# Altium PCB PCB1.PcbDoc
Units mil, origin at the board's own origin, x right, y up, seen from the top; angles counter-clockwise.
Board outline 1625 x 1985 mil, 2 copper layers (Top Layer, Bottom Layer); 28 components, 17 nets, 88 pads, 25 vias.
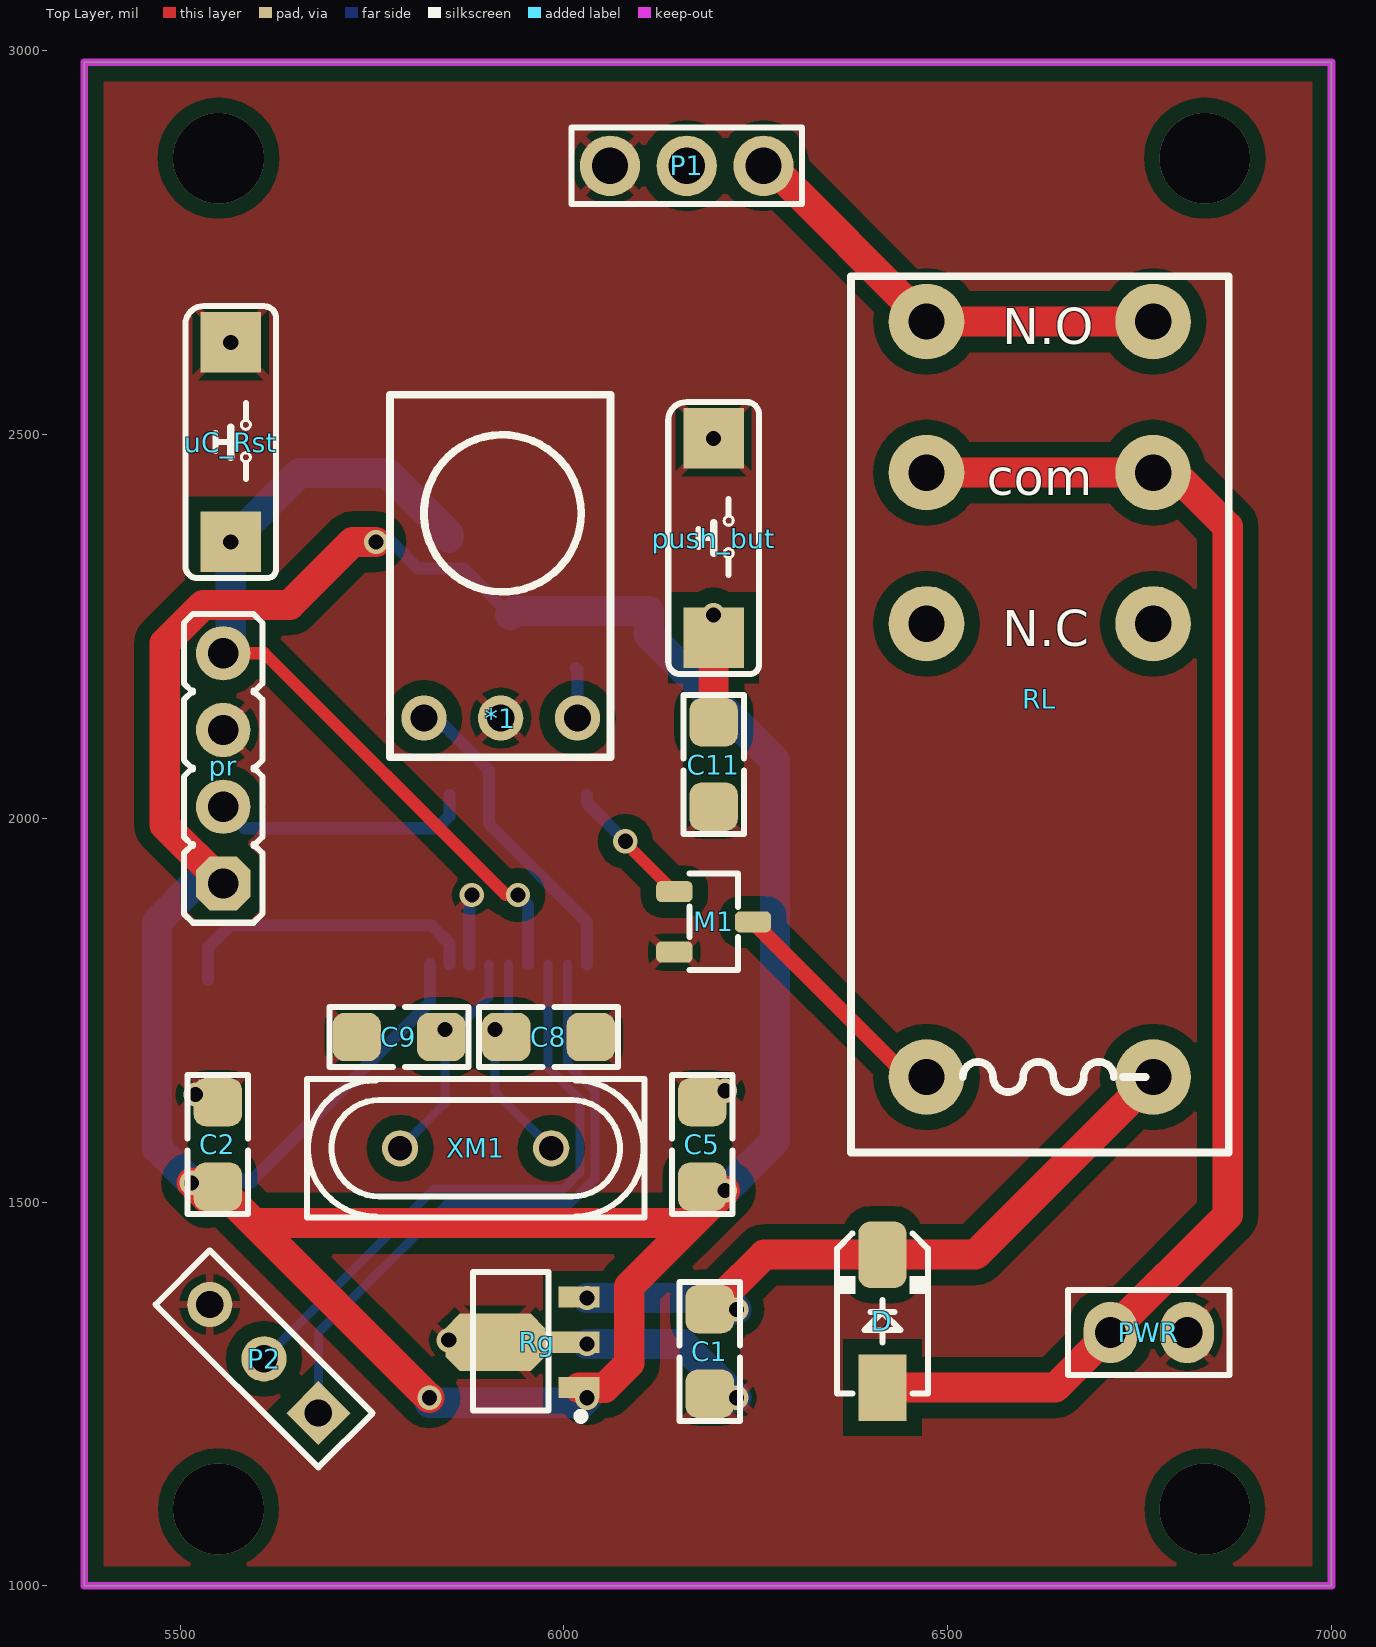
[diagram p0: Top Layer view]
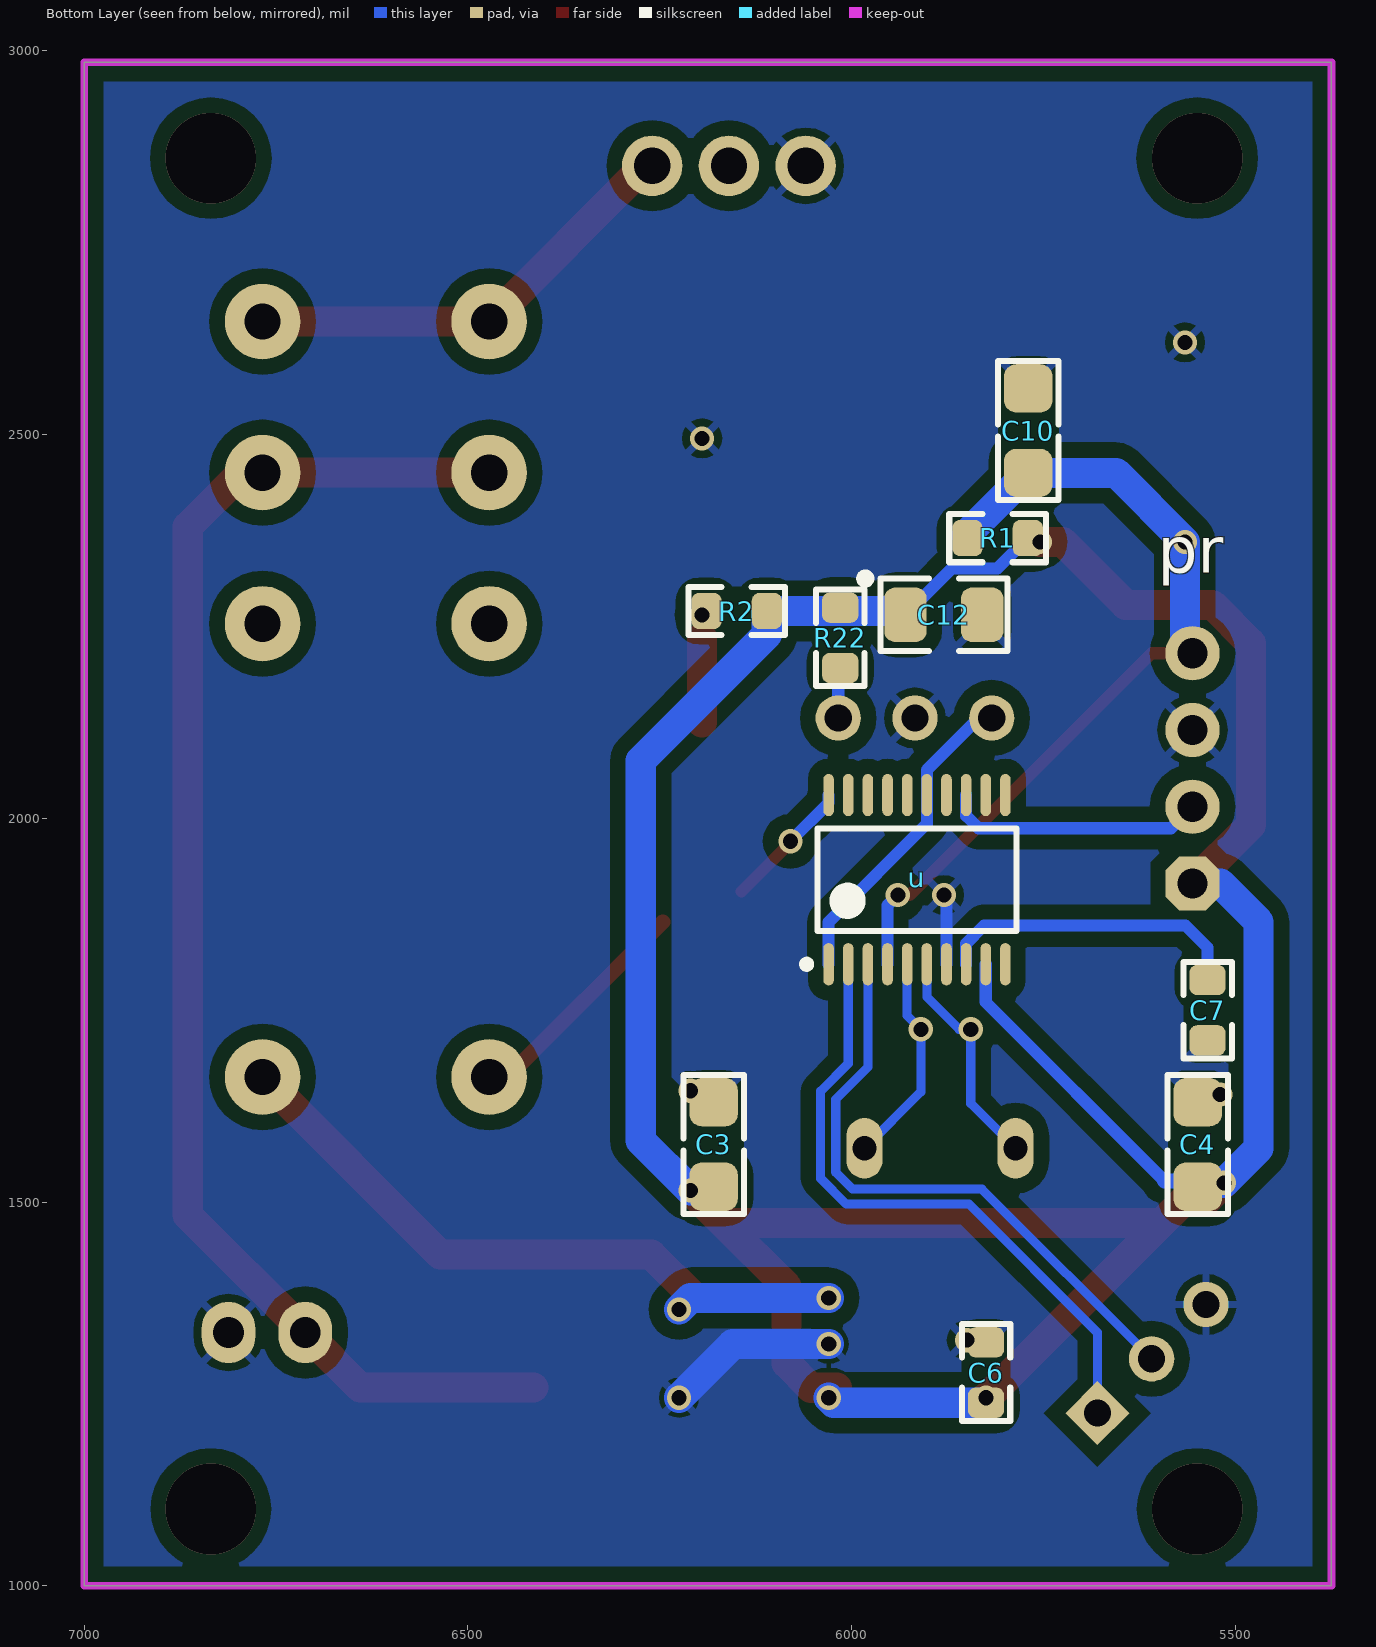
[diagram p1: Bottom Layer view, seen from below]
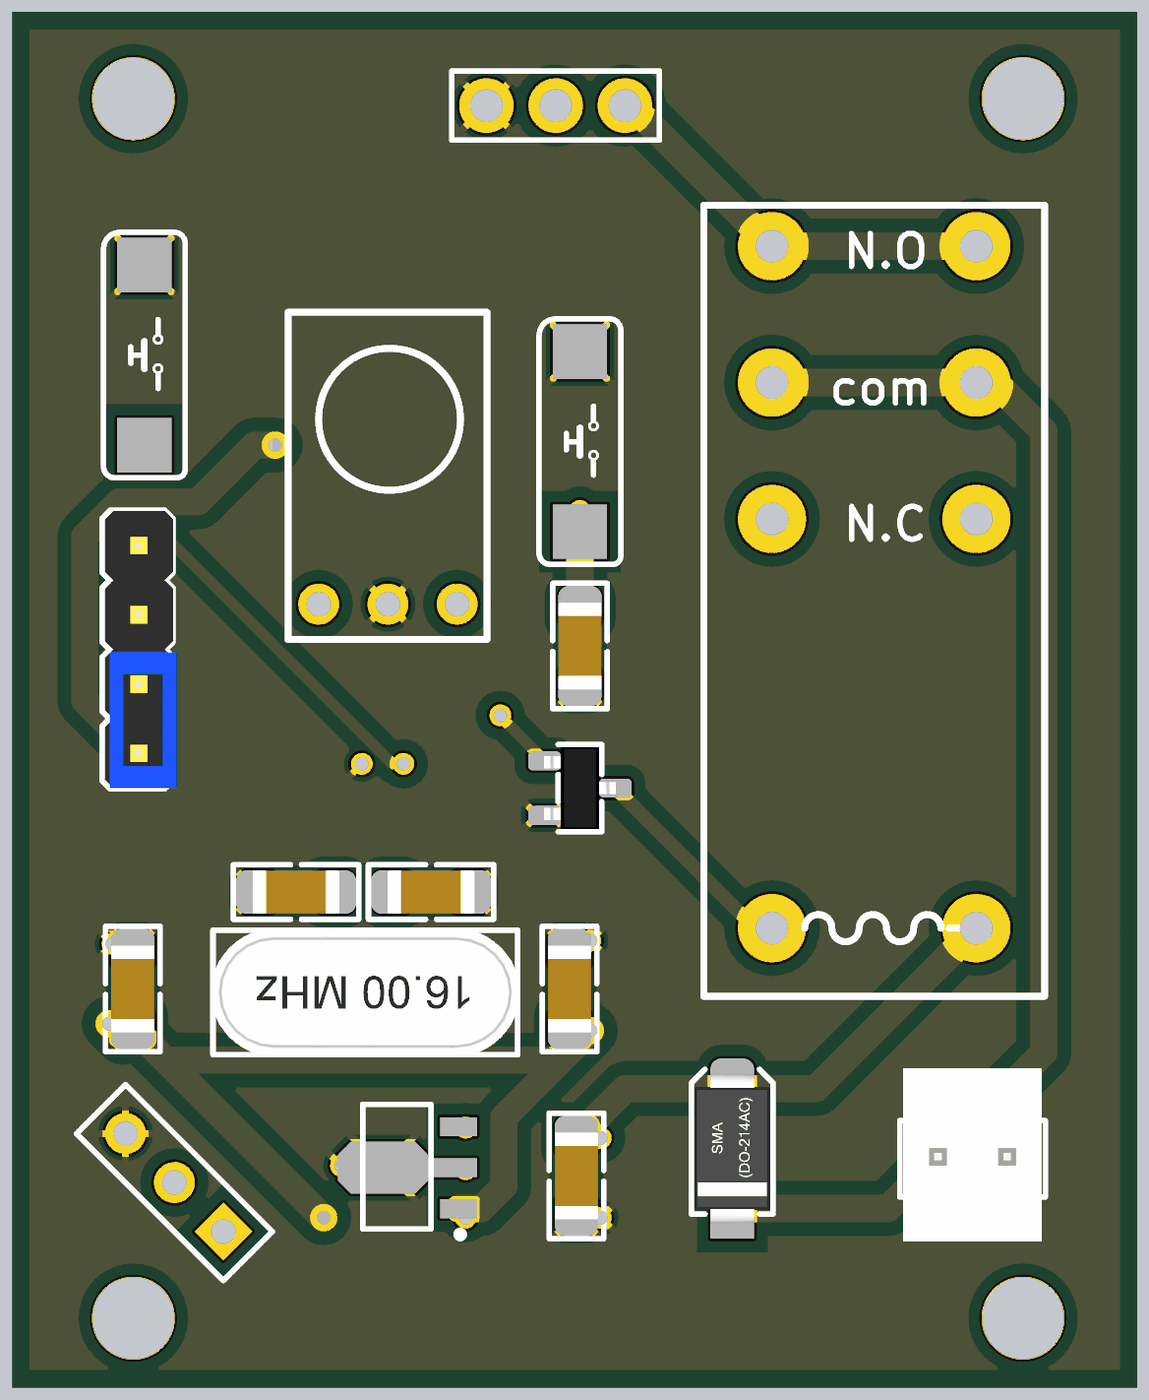
[diagram p2: 3D render of the assembled board from above, using the file's embedded part models]
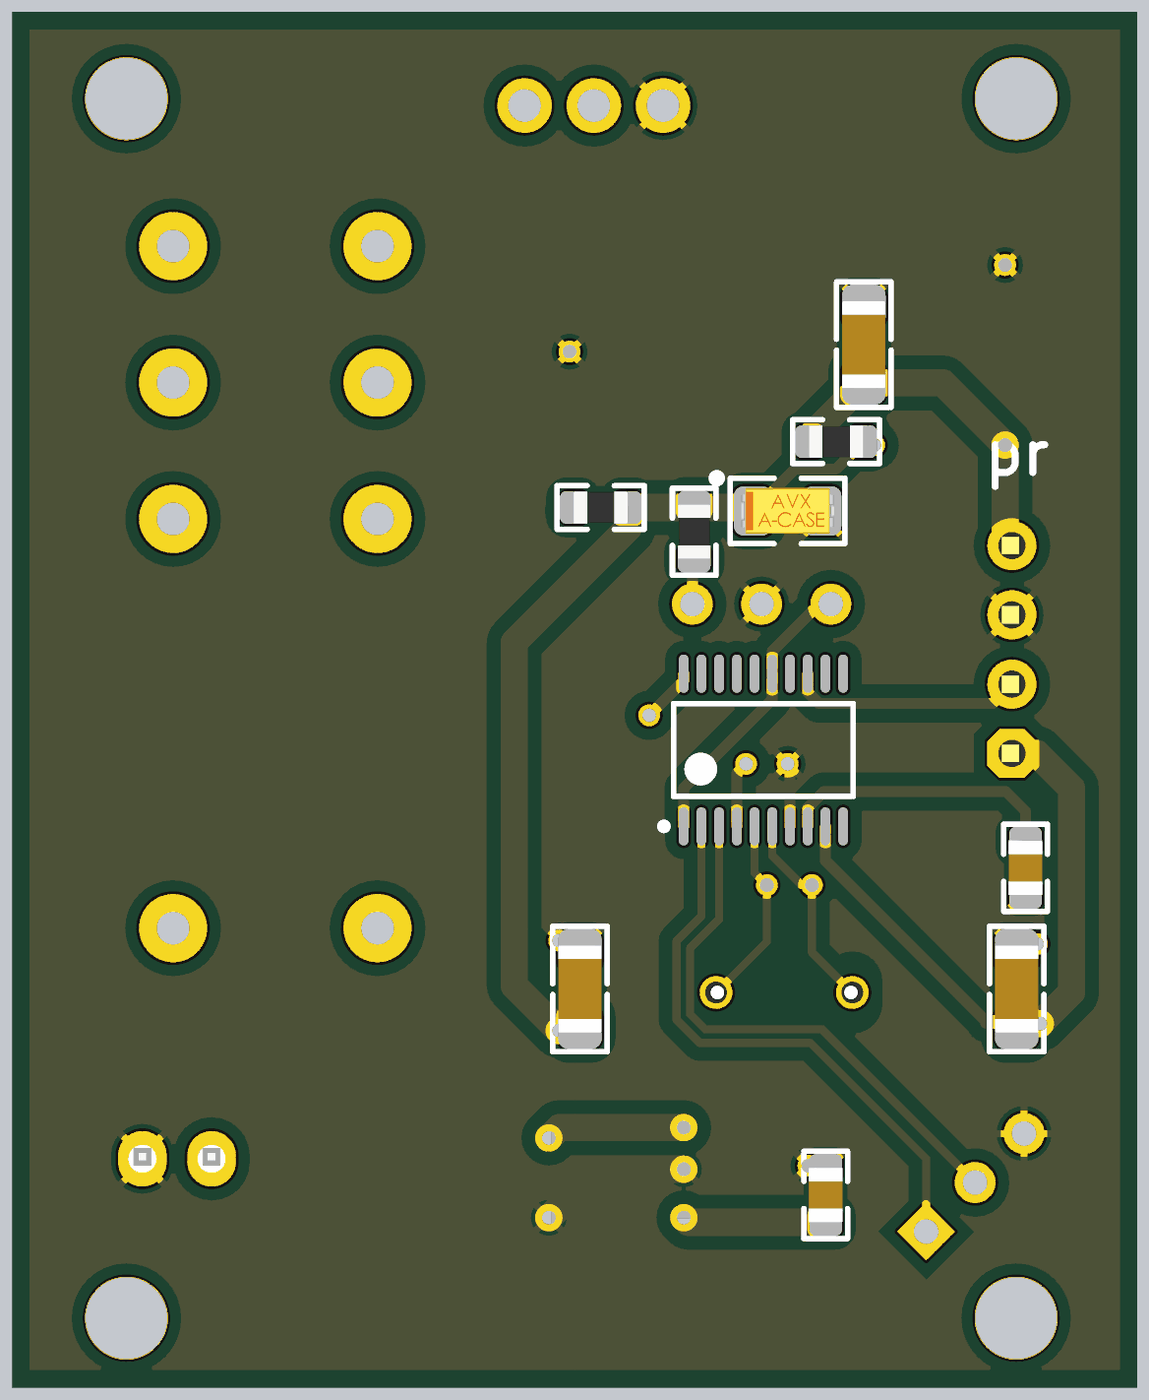
[diagram p3: 3D render of the assembled board from below, using the file's embedded part models]

## Layer stack, top to bottom
Top Solder: solder mask 0.4, Solder Resist, Dk 3.5
Top Layer: signal copper 1.4
Dielectric 1: dielectric 12.6, FR-4, Dk 4.8
Bottom Layer: signal copper 1.4
Bottom Solder: solder mask 0.4, Solder Resist, Dk 3.5

## Board outline
5375,1000 7000,1000 7000,2985 5375,2985

## Design rules (kind name [scope] priority, off if disabled: settings)
Clearance Clearance_1 [InPadClass('SCREW')] p1: gap=62.99
Clearance [All] p2: gap=7.87 except(19.68: Arc-Poly Track-Poly SMDPad-Poly THPad-Poly Via-Poly Fill-Poly Poly-Poly)
DiffPairsRouting [All] p1: maxlimit=15.75 minlimit=7.87 mostfreqgap=11.81 toplayer_minwidth=7.87 toplayer_maxwidth=19.68 toplayer_prefwidth=11.02 bottomlayer_minwidth=7.87 bottomlayer_maxwidth=19.68 bottomlayer_prefwidth=11.02 maxuncoupledlength=500
HoleSize [All] p1: absolutevalues=TRUE maxlimit=314.96 minlimit=1 maxpercent=80.000 minpercent=20.000
HoleToHoleClearance [All] p1: gap=7.87 allowstackedmicrovias=TRUE
MatchedLengths [InNetClass('USB')] p1: tolerance=39.37 checknetsindiffpair=FALSE checkdiffpairvsdiffpair=TRUE checkothers=TRUE
MinimumSolderMaskSliver [All] p1: minsoldermaskwidth=0.39
PolygonConnect [All] p1: connectstyle=Relief reliefconductorwidth=10 reliefentries=4 polygonreliefangle="45 Angle" airgapwidth=10
RoutingVias [All] p1: holewidth=19.68 width=31.5 viastyle="Through Hole" minholewidth=15.75 minwidth=21.65 maxholewidth=39.37 maxwidth=47.24
SilkToSilkClearance [All] p1: silktosilkclearance=3.94
SilkToSolderMaskClearance [IsPad vs IsText] p1: minsilkscreentomaskgap=0.04 clearancetoexposedcopper=TRUE
SolderMaskExpansion [All] p1: expansion=4
Width [All] p1: maxlimit=78.74 minlimit=11.81 preferedwidth=19.68
24 further rules are at their usual default settings.

## Classes and differential pairs
component class Sheet1: " " "  " M1 pr Rg RL

## Components (designator, comment, footprint, x,y, rotation, side; value= is the part's Value field where it differs from the comment)
*1 "RYS1838T" RYS1838T 5920,2350 r0 top
C1 "330nF" 1206C 6190,1305.4 r270 top
C2 "10nF" 1206C 5549.17,1575 r90 top
C3 "100nF" 1206C 6180,1575 r270 bottom
C4 "100nF" 1206C 5549.17,1575 r270 bottom
C5 "100nF" 1206C 6180,1575 r270 top
C6 "2.2uF" 0805C 5825,1277.84 r270 bottom
C7 "2.2uF" 0805C 5536.38,1750 r270 bottom
C8 "20pF" 1206C 5980,1715 r0 top
C9 "20pF" 1206C 5785,1715 r180 top
C10 "100nF" 1206C 5770,2505 r270 bottom
C11 "100nF" 1206C 6195,2070 r90 top
C12 "4.7uF" SIZE_A 5880,2265 r180 bottom
D "1N5822" 430X270D 6415,1344.83 r90 top
M1 "AO3416" SOT23_3 6195,1865 r0 top
P1 "Header 3" HDR1X3#1 6260,2850 r180 top
P2 "Header 3" HDR1X3#2 5680,1225 r135 top
pr "programmer header" HEADER_4_JMP 5556.06,2065 r90 top
push_but "switch_mini" switch_mini_smd 6195,2365 r90 top
PWR "Header2" "COMM HEADER 2" 6762.01,1330 r0 top
R1 "100k" 0805L 5810,2365 r180 bottom
R2 "100k" 0805L 6150,2270 r180 bottom
R22 "100R" 0805L 6015,2235 r270 bottom
Rg "78L05" SOT-89 5965,1317.21 r90 top
RL "Relay-DPDT" RELAY-DPDT-1 6620,2155 r0 top
u "STM8S003F3" TSSOP20_L 5915,1920 r90 bottom
uC_Rst "switch_mini" switch_mini_smd 5565.91,2490 r90 top
XM1 "8MHz" XTLT_2 5885,1570 r180 top

## Footprints (in the part's own frame and the unit in brackets; to place one, negate y for a bottom-side part, rotate by r counter-clockwise, add the part's x,y. Pads: shape width x height; smd on the part's side, far side on the other; paste and mask are expansions set on the pad)
430X270D [mm] "SMA Molded Diode, 2-Leads, Body 4.3x2.7mm"
  rect 2.2x1.6 smd: 1(-2.2,0)
  rrect50% 2.2x1.6 smd: 2(2.2,0)
  silkscreen extent -2.4,-1.5 2.9,1.5, body extent -2.75,-1.4 2.75,1.4, height 2.6
0805C [mm] ",0805, 2012, 200X130"
  rrect50% 1x1.2 smd mask+0.075: 1(-1,0) 2(1,0)
  Top Layer pour cut-out: -0.5,0.8 0.5,0.8 0.5,-0.8 -0.5,-0.8
  silkscreen extent -1.6,-0.8 1.6,0.8, body extent -1,-0.63 1,0.63, height 1
0805L [mm] ",0805, 2012, 200X130"
  rrect50% 1x1.2 smd mask+0.075: 1(-1,0) 2(1,0)
  Top Layer pour cut-out: -0.5,0.8 0.5,0.8 0.5,-0.8 -0.5,-0.8
  silkscreen extent -1.6,-0.8 1.6,0.8, body extent -1,-0.6 1,0.6, height 0.95
1206C [mm] "Molded/Chip Capacitor, 2-Leads, Body 3.2x1.6mm, IPC Medium Density, 3216, 320X160"
  rrect50% 1.6x1.6 smd mask+0.075: 1(-1.4,0) 2(1.4,0)
  Top Layer pour cut-out: -0.8,1 -0.8,-1 0.8,-1 0.8,1
  silkscreen extent -2.3,-1 2.3,1, body extent -1.6,-0.8 1.6,0.8, height 1
"COMM HEADER 2" [mil] "Communication Header Connector 2 pin"
  oval 70x80 hole 40: 1(-50,0) 2(50,0)
  silkscreen extent -105,-55 105,55, body extent -100,-119 100,131, height 413
HDR1X3#1 [mm] "Connector; Header; 3 Position"
  round 2 hole 1.2: 1(0,0) 2(2.54,0) 3(5.08,0)
  silkscreen extent -1.27,-1.27 6.35,1.27
HDR1X3#2 [mm] "Connector; Header; 3 Position"
  rect 1.5x1.5 hole 0.9: 1(0,0)
  round 1.5 hole 0.9: 2(2.54,0) 3(5.08,0)
  silkscreen extent -1.27,-1.27 6.35,1.27
HEADER_4_JMP [mm] "HEADER 4 PIN WITH JUMPER"
  oct 1.8x1.8 hole 1 mask+0.1: 1(-3.81,0)
  round 1.8 hole 1 mask+0.1: 2(-1.27,0) 3(1.27,0) 4(3.81,0)
  silkscreen extent -5.11,-1.3 5.11,1.3, body extent -5.08,-1.42 5.08,1.19, height 8.57
RELAY-DPDT-1 [mm]
  round 2.5 hole 1.2: 1(-3.75,7.5) 2(-3.75,12.5) 3(-3.75,2.5) 4(3.75,7.5) 5(3.75,12.5) 6(3.75,2.5) 7(-3.75,-12.5) 8(3.75,-12.5)
  silkscreen extent -6.25,-15 6.25,14
RYS1838T [mm]
  round 1.5 hole 0.9: 1(-2.6,-5.575) 2(-0.06,-5.575) 3(2.48,-5.575)
  silkscreen extent -3.73,-6.88 3.57,5.13
SIZE_A [mm] "SIZE_A TANTALUM CHIP CAPACITORS, AVX TAJ SERIES"
  rrect50% 1.4x1.8 smd: 1(-1.27,0) 2(1.27,0)
  silkscreen extent -2.75,-1.2 2.1,1.35, body extent -1.7,-0.84 1.7,0.84, height 1.71
SOT23_3 [mm] "SOT-23, Micro3, MO-178, TO-236AB, MO-193C, SuperSOT3, SC-59, DSO190_3_300X150"
  rrect50% 1.2x0.7 smd mask+0.1: 1(-1.3,1) 2(-1.3,-1) 3(1.3,0)
  silkscreen extent -0.8,-1.6 0.8,1.6, body extent -1.32,-1.5 1.32,1.5, height 1.08
SOT-89 [mm] "SOT-89"
  rect 0.7x1.35 smd: 1(-1.5,-1.388) 3(1.5,-1.388)
  rect 0.7x1.8 smd: 2(0,-1.163)
  oct 1.9x3.3 smd: 2(0,1.388)
  silkscreen extent -2.57,-1.58 2.33,2.13
switch_mini_smd [mm]
  rect 2x2 smd: 1(-3.3,0) 2(3.3,0)
  silkscreen extent -4.5,-1.5 4.5,1.5
TSSOP20_L [mm] "TSOP, 20-Leads, Body 6.5x4.4mm, Pitch 0.65mm, IPC High Density"
  oval 1.4x0.35 smd: 1(-2.8,2.925) 2(-2.8,2.275) 3(-2.8,1.625) 4(-2.8,0.975) 5(-2.8,0.325) 6(-2.8,-0.325) 7(-2.8,-0.975) 8(-2.8,-1.625) 9(-2.8,-2.275) 10(-2.8,-2.925) 11(2.8,-2.925) 12(2.8,-2.275) 13(2.8,-1.625) 14(2.8,-0.975) 15(2.8,-0.325) 16(2.8,0.325) 17(2.8,0.975) 18(2.8,1.625) 19(2.8,2.275) 20(2.8,2.925)
  silkscreen extent -2.92,-3.3 1.7,3.78, body extent -2.25,-3.3 2.25,3.3, height 1.2
XTLT_2 [mm] "Crystal PTH HC49S"
  round 1.2 / inner oval 1.2x2 / far side oval 1.2x2 hole 0.8: 1(-2.5,0)
  round 1.2 / inner round 1.2 / far side oval 1.2x2 hole 0.8: 2(2.5,0)
  silkscreen extent -5.59,-2.29 5.59,2.29, body extent -5.67,-2.32 5.67,2.33, height 3.6

## Part data
C1 C2 C3 C4 C5 C6 C7 C8 C9 C10 C11: library part Cap, "Capacitor"
C12: library part Cap-Tantal, "Capacitor, Tantalum,"
D: library part 1N5819
M1: library part MESFET-P, "P-Channel MESFET"
P1 P2: "Header, 3-Pin"
pr: library part "Header 4", "Header, 4-Pin"
PWR: library part "Header 2", "Header, 2-Pin"
R1 R2 R22: library part R
Rg: library part 78LXX, "Voltage Regulator"
RL: "Dual-Pole Dual-Throw Relay"
u: library part Component_1
XM1: library part XTAL

## Via types
v1: diameter 31.5, hole 19.68, Top Layer to Bottom Layer, 21 vias
v2: diameter 118.11, hole 118.11, Top Layer to Bottom Layer, 4 vias

## Nets (pads, with @x,y where several pads share a name; then routed paths per layer and width w, separated by ;. In a path a pad name is that pad's centre, name@x,y a point inside that pad or via, vN(x,y) a via of type N, cw(c..) or ccw(c..) an arc to the next point about the centre after c; other vN are vias at no path point)
BUTTOM: C11.2 push_but.1 R2.1 | length 110
  Top Layer w39.37: C11.2 push_but.1
  other v1: 6195,2265
GND: *1.2 C1.2 C2.2 C3.1 C4.1 C5.1 C6.1 C7.2 C8.2 C9.2 C10.1 C11.1 C12.2 M1.2 P1.3 P2.3 pr.3 push_but.2 PWR.2 Rg.2 u.7 uC_Rst.2 | length 315.8
  Bottom Layer w15.75: u.7 v1@5876.61,1901.61
  Bottom Layer w39.37: v1(6030,1315) 6155,1315 v1(6225,1245)
  other v1: 5850,1320 5520,1640 6210,1645 5880,1900 6195,2494.92 5565.91,2619.92
INPUT_SIGNAL: *1.1 u.1 u.15 | length 418.6
  Bottom Layer w15.75: *1.1 5834.49,2130.51 5902.2,2062.8 u.15 5902.2,1992.8 6030.16,1864.84 u.1
LED_OUT: P1.1 RL.2 RL.5 | length 591.7
  Top Layer w39.37: P1.1 6269.49,2850 RL.2 RL.5
Net*1_3: *1.3 R22.2 | length 66.2
  Bottom Layer w15.75: R22.2 6017.64,2192.99 *1.3
NetC7_1: C7.1 u.8 | length 405.2
  Bottom Layer w15.75: C7.1 5536.38,1831.38 5565,1860 5827.88,1860 5851.02,1836.86 u.8
NetM1_3: M1.3 RL.7 | length 309.9
  Top Layer w19.68: M1.3 RL.7@6448.31,1662.87
  Top Layer w39.37: RL.7@6448.31,1662.87 RL.7
NRST: C10.2 pr.4 R1.1 u.4 uC_Rst.1 | length 1118.4
  Top Layer w15.75: pr.4 5609.54,2215 5924.54,1900 v1(5940,1900)
  Bottom Layer w15.75: v1(5940,1900) 5953.39,1886.61 u.4
  Bottom Layer w39.37: pr.4 5565.91,2224.84 v1(5565.91,2360.08) 5655.71,2449.88 C10.2 5849.37,2370.51 R1.1
OSC_IN: C8.1 u.5 XM1.1 | length 277.5
  Bottom Layer w11.81: u.5 5927.8,1742.8 v1(5910,1725) 5910,1643.43 XM1.1
OSC_OUT: C9.1 u.6 XM1.2 | length 296.4
  Bottom Layer w11.81: XM1.2 5845,1628.43 v1(5845,1725) 5860,1725 5902.2,1767.2 u.6
RL_PIN: M1.1 u.20 | length 172.9
  Top Layer w15.75: v1(6080,1970) 6080,1968.19 M1.1
  Bottom Layer w15.75: u.20 6030.16,2019.84 v1(6080,1970)
SYS_SWIM: pr.2 u.13 | length 340.4
  Bottom Layer w15.75: pr.2 5584.14,1986.93 5834.81,1986.93 5851.02,2003.14 u.13
UART_RX: P2.2 u.3 | length 800.6
  Bottom Layer w11.81: P2.2 5830.43,1516.85 5998.92,1516.85 6020.83,1538.76 6020.83,1633.84 5978.98,1675.69 u.3
UART_TX: P2.1 u.2 | length 842.7
  Bottom Layer w11.81: P2.1 5680,1330 5847.17,1497.17 6007.07,1497.17 6040.51,1530.61 6040.51,1629.49 6040.51,1644.49 6004.57,1680.43 u.2
V5: C2.1 C3.2 C4.2 C5.2 C6.2 C12.1 pr.1 R1.2 R2.2 R22.1 Rg.1 u.9 | length 4349.8
  Top Layer w39.37: v1(5515,1525) C2.1@5534.65,1505.35 ; C2.1 5596.56,1472.5 ; pr.1 5480,1991.06 5480,2228.02 5529.97,2277.99 5642.99,2277.99 5725,2360 v1(5755,2360) ; v1(5825,1245) 5824.06,1245 5596.56,1472.5 ; Rg.1 6053.16,1258.16 6085,1290 6085,1390 6167.5,1472.5 ; v1(6210,1515) 6167.5,1472.5 ; 5596.56,1472.5 6167.5,1472.5
  Bottom Layer w15.75: 5592.5,1527.5 5825.43,1760.43 u.9 ; R1.2 5810,2325.63 5869.37,2325.63 C12.1
  Bottom Layer w19.68: C4.2 5556.79,1527.5 5592.5,1527.5
  Bottom Layer w39.37: v1(5515,1525) 5470,1570 5470,1865 5520,1915 pr.1 ; C6.2 6023.47,1238.47 v1(6030,1245) ; C12.1 5935,2270 R2.2 6110.63,2239.37 6275,2075 6275,1580 v1(6210,1515)
VIN: D.1 PWR.1 RL.1 RL.4 | length 1861.9
  Top Layer w39.37: D.1 6640.23,1258.22 PWR.1 6865,1482.99 6865,2380 6794.72,2450.28 RL.4 RL.1
VIN1: C1.1 D.2 Rg.3 RL.8 | length 879.7
  Top Layer w39.37: C1.1@6207.24,1377.76 6260.93,1431.45 D.2 6536.21,1431.45 RL.8
  Bottom Layer w39.37: v1(6030,1375) 6210,1375 v1(6225,1360)
pads on no net: P1.2 RL.3 RL.6 u.10 u.11 u.12 u.14 u.16 u.17 u.18 u.19
copper on no net:
  other v2: 5550,1100 6835,1100 5550,2860 6835,2860

## Polygon pours and split planes (outlines as drawn)
GND on Top Layer "Top Layer-No Net" (solid, remove dead copper, pour order 13): 5375,1000 5375,2975 7000,2975 7000,1000
GND on Bottom Layer "Top Layer-No Net" (solid, remove dead copper, pour order 15): 5375,1000 7000,1000 7000,2985 5375,2985

## Keep-outs
Keep-Out Layer:
  the board outline again, w10

## Text inside footprints (layer, text, board x,y; h text height)
RL: Top Overlay "N.O" at 6570.79,2617.6 h47.24; Top Overlay "com" at 6551.1,2420.75 h47.24; Top Overlay "N.C" at 6570.79,2223.9 h47.24